# Allegro board s08-2.brd
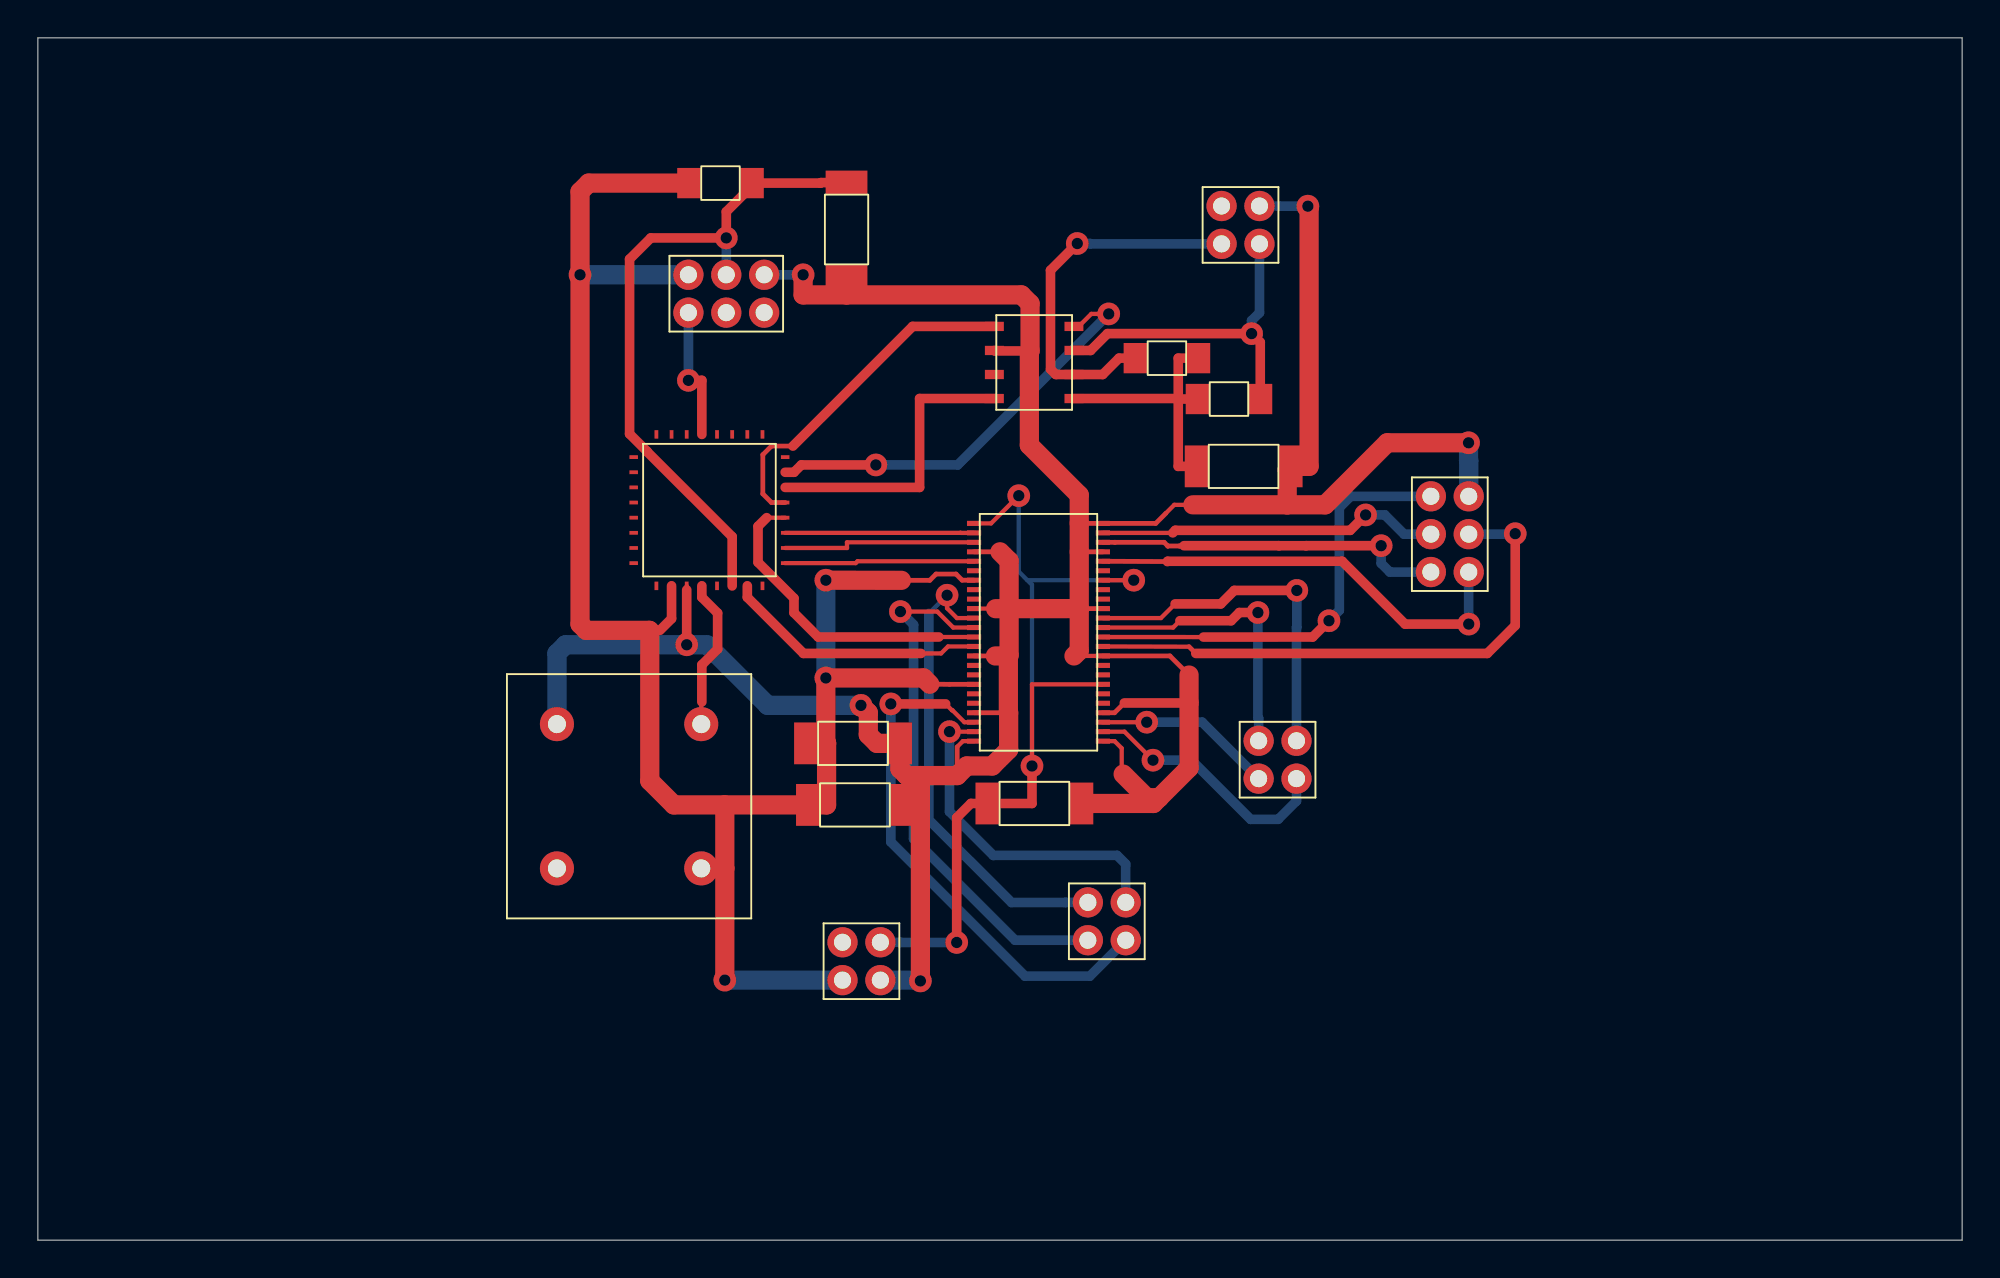
[diagram p0: board, top side]
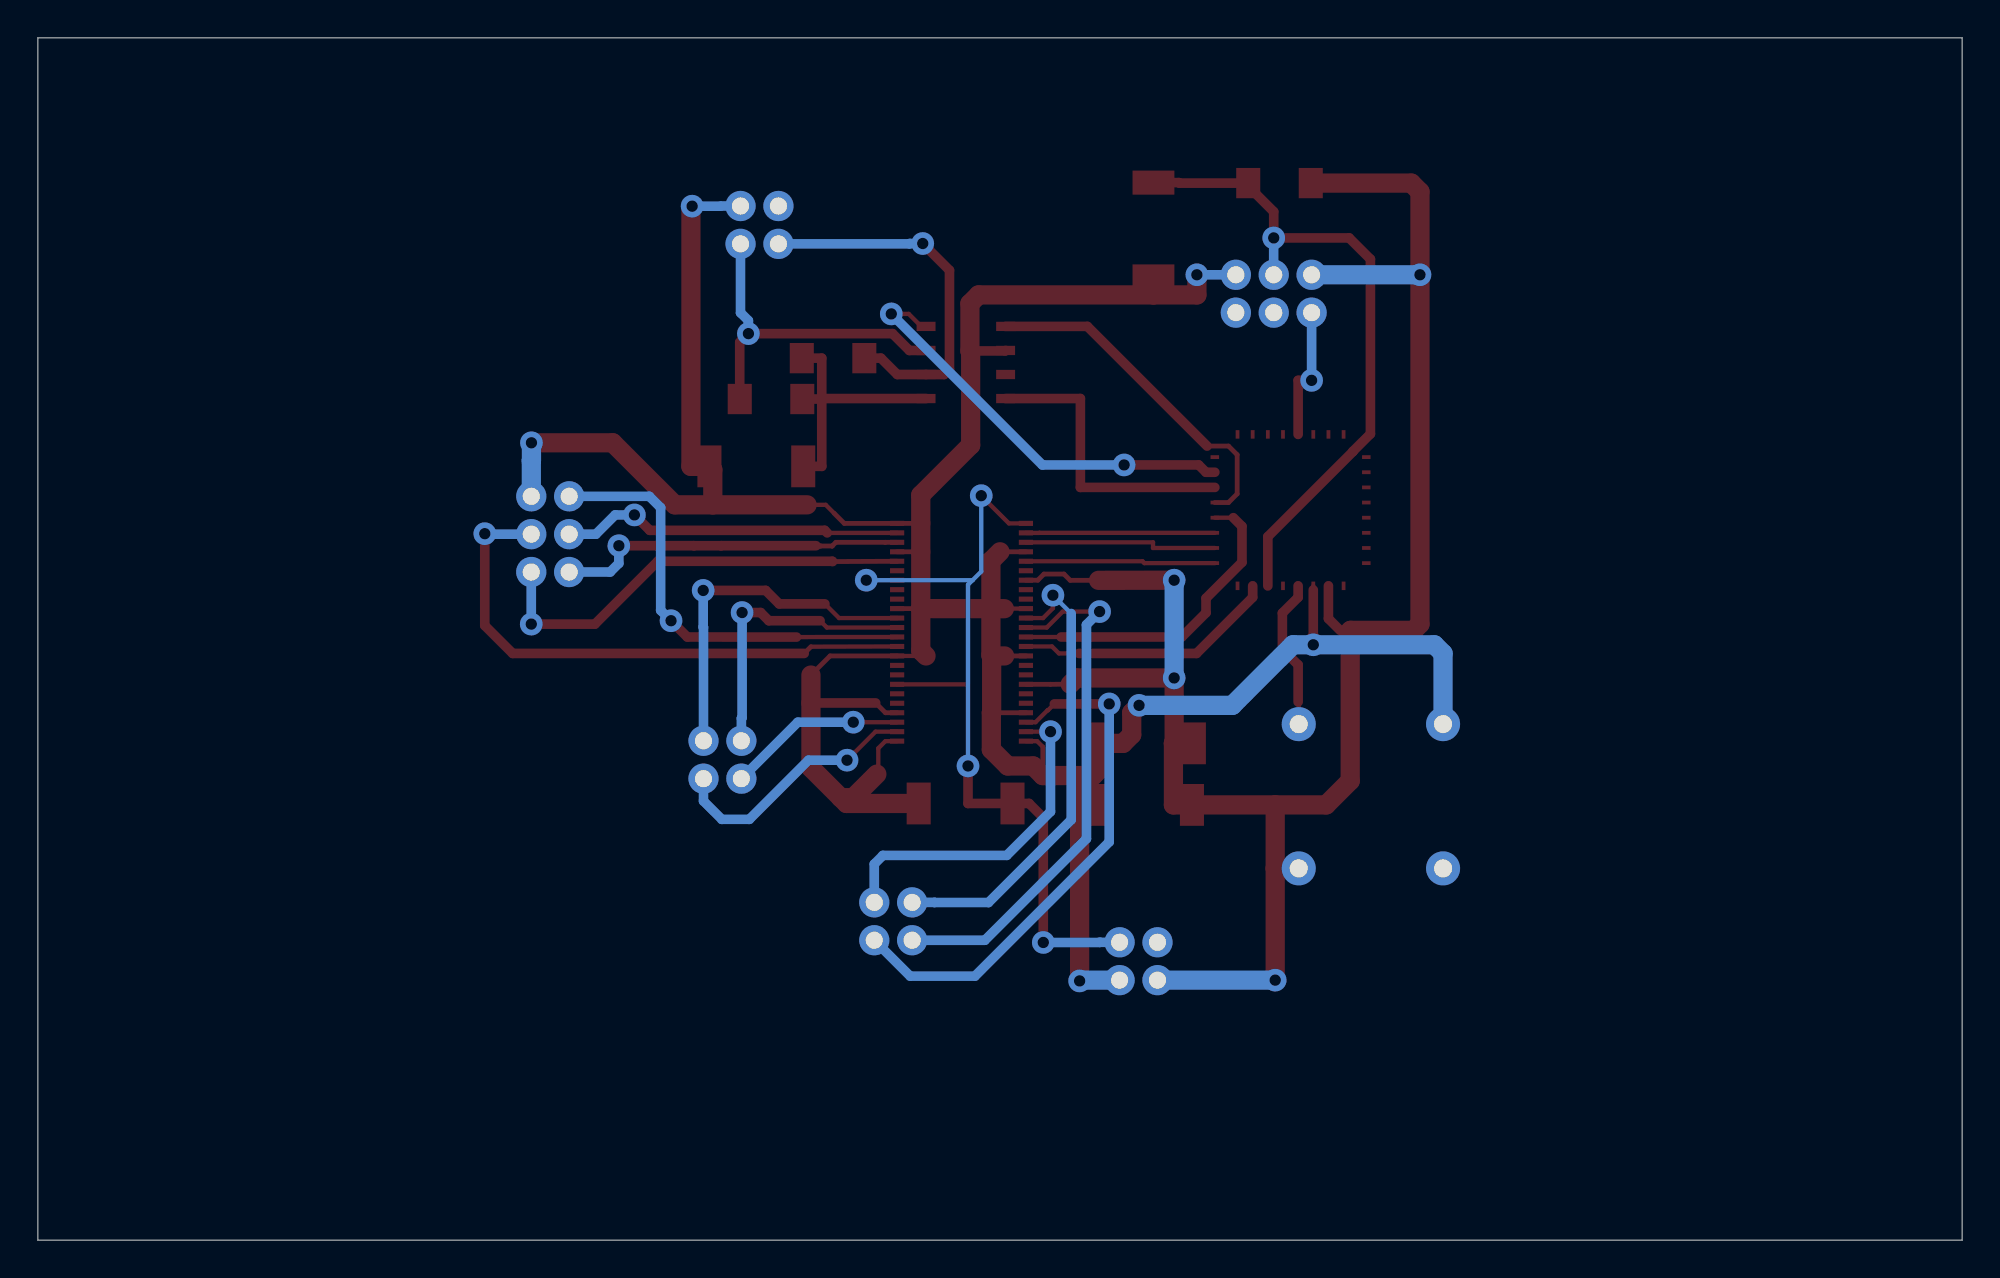
[diagram p1: board, bottom side, seen from below]

Outline 101.6 x 63.5 mm; copper layers: TOP, BOTTOM. Coordinates in mm from the lower left corner of the outline.
Outline path: 0,63.5 101.6,63.5 101.6,0 0,0 0,63.5

## Placement (name value [footprint] x y rotation side)
C9  0.1u  [SMDCAP]  43.1 26.24 0 top
C10  0.1u  [SMDCAP]  52.68 23.06 0 top
C11  0.1u  [SMDCAP]  63.6 40.87 180 top
C12  0.1u  [SMDCAP]  42.7 53.44 90 top
C13  10u  [SMDCAP]  43.21 22.99 0 top
J7  Background Header  [HEADER6]  36.35 49.99 90 top
J12  CON6  [HEADER6]  74.55 37.29 0 top
J14  CON4  [HEADER4]  43.48 14.73 270 top
J15  CON4  [HEADER4]  63.5 53.62 90 top
J16  CON4  [HEADER4]  65.46 25.37 270 top
J17  CON4  [HEADER4]  56.44 16.84 0 top
R3  60  [SMDRES]  62.89 44.42 0 top
R4  60  [SMDRES]  59.61 46.58 0 top
R5  10k  [SMDRES]  36.04 55.83 180 top
U1  MC9S08DZ60  [MC9S08_LQFP32]  35.46 38.56 90 top
U2  SN74LVC16T245  [SN74_DGG]  52.83 32.11 0 top
U3  TJA1040T  [TJA1040_SO8]  52.6 46.36 0 top
U4  -  [OSCILLATOR]  31.22 23.44 90 top

## Library data of the parts
C9 C10 C13 = C_elect_0: Tolerance: ***; User Part Number: ***
C11 = C
C12 = C: Tolerance: ***; User Part Number: ***
J7 = CONN MOD 6-6_J
J12 = CON6
J14-J17 = CON4
R3-R5 = R
U1 = MC9S08DZ60
U2 = SN74LVC16T245
U3 = TJA1040T
U4 = OSCILLATOR_0

## Footprints (pads in the part's own frame, mm; a bottom-side part is the same pattern mirrored in y, then rotated)
HEADER4
  round 1.6 hole 0.9: 1(-1,1) 2(-1,-1) 3(1,-1) 4(1,1)
HEADER6
  round 1.6 hole 0.9: 1(-1,2) 2(-1,0) 3(-1,-2) 4(1,-2) 5(1,0) 6(1,2)
MC9S08_LQFP32
  rect 0.45x0.2 smd: 1(-4,2.8) 2(-4,2) 3(-4,1.2) 4(-4,0.4) 5(-4,-0.4) 6(-4,-1.2) 7(-4,-2) 8(-4,-2.8) 17(4,-2.8) 18(4,-2) 19(4,-1.2) 20(4,-0.4) 21(4,0.4) 22(4,1.2) 23(4,2) 24(4,2.8)
  rect 0.2x0.45 smd: 9(-2.8,-4) 10(-2,-4) 11(-1.2,-4) 12(-0.4,-4) 13(0.4,-4) 14(1.2,-4) 15(2,-4) 16(2.8,-4) 25(2.8,4) 26(2,4) 27(1.2,4) 28(0.4,4) 29(-0.4,4) 30(-1.2,4) 31(-2,4) 32(-2.8,4)
OSCILLATOR
  round 1.8 hole 0.95 unplated: (-3.81,3.81) (-3.81,-3.81) (3.81,3.81) (3.81,-3.81)
SMDCAP
  rect 1.27x2.21 smd: 1(-2.54,0) 2(2.413,0)
SMDRES
  rect 1.27x1.6 smd: 1(-1.651,0) 2(1.651,0)
SN74_DGG
  rect 0.75x0.27 smd: 1(-3.4,5.75) 2(-3.4,5.25) 3(-3.4,4.75) 4(-3.4,4.25) 5(-3.4,3.75) 6(-3.4,3.25) 7(-3.4,2.75) 8(-3.4,2.25) 9(-3.4,1.75) 10(-3.4,1.25) 11(-3.4,0.75) 12(-3.4,0.25) 13(-3.4,-0.25) 14(-3.4,-0.75) 15(-3.4,-1.25) 16(-3.4,-1.75) 17(-3.4,-2.25) 18(-3.4,-2.75) 19(-3.4,-3.25) 20(-3.4,-3.75) 21(-3.4,-4.25) 22(-3.4,-4.75) 23(-3.4,-5.25) 24(-3.4,-5.75) 25(3.4,-5.75) 26(3.4,-5.25) 27(3.4,-4.75) 28(3.4,-4.25) 29(3.4,-3.75) 30(3.4,-3.25) 31(3.4,-2.75) 32(3.4,-2.25) 33(3.4,-1.75) 34(3.4,-1.25) 35(3.4,-0.75) 36(3.4,-0.25) 37(3.4,0.25) 38(3.4,0.75) 39(3.4,1.25) 40(3.4,1.75) 41(3.4,2.25) 42(3.4,2.75) 43(3.4,3.25) 44(3.4,3.75) 45(3.4,4.25) 46(3.4,4.75) 47(3.4,5.25) 48(3.4,5.75)
TJA1040_SO8
  rect 1x0.49 smd: 1(-2.1,1.905) 2(-2.1,0.635) 3(-2.1,-0.635) 4(-2.1,-1.905) 5(2.1,-1.905) 6(2.1,-0.635) 7(2.1,0.635) 8(2.1,1.905)

## Nets
GND: C9.2(-) C10.2(-) C11.1 C12.1 C13.2(-) J7.4(2) J12.6 J14.4 J15.3 U1.3(VSS) U2.4(GND#4) U2.10(GND#10) U2.15(GND#15) U2.21(GND#21) U2.24(2DIR) U2.25(2OEN) U2.28(GND#28) U2.34(GND#34) U2.39(GND#39) U2.45(GND#45) U2.48(1OEN) U3.2(GND)
VCC_1.8: C10.1(+) J14.1 U2.1(1DIR) U2.31(VCCA#31) U2.42(VCCA#42)
VCC_5.0: C9.1(+) C13.1(+) J7.6 J14.3 R5.2 U1.2(VDD) U2.7(VCCB#7) U2.18(VCCB#18)
VDD_S08: U3.3(VCC)
1A4: U2.43(1A4)
1A5: U2.41(1A5)
1A6: U2.40(1A6)
1A7: J16.1 U2.38(1A7)
1A8: J16.2 U2.37(1A8)
1B4: U2.6(1B4)
1B5: U2.8(1B5)
1B6: U2.9(1B6)
1B7: J17.1 U2.11(1B7)
1B8: J17.2 U2.12(1B8)
2A3: U2.33(2A3)
2A4: U2.32(2A4)
2A5: U2.30(2A5)
2A6: U2.29(2A6)
2A7: J16.3 U2.27(2A7)
2A8: J16.4 U2.26(2A8)
2B3: U2.16(2B3)
2B4: U2.17(2B4)
2B5: U2.19(2B5)
2B6: U2.20(2B6)
2B7: J17.3 U2.22(2B7)
2B8: J17.4 U2.23(2B8)
BKGD: J7.1 U1.21(BKGD/MS)
CANH: J15.2 R3.2 U3.7(CANH)
CANL: J15.1 R4.1 U3.6(CANL)
EXTAL: U1.4(PTG0/EXTAL)
RESET: C12.2 J7.5(4) R5.1 U1.6(RESETN)
RXCAN: U1.14(PTE7/RXD2/RXCAN) U3.4(RXD)
SPI_CLOCK_1.8V: J12.3 U2.46(1A2)
SPI_CLOCK_5V: U1.10(PTE3/SPSCK) U2.3(1B2)
SPI_CS_1.8V: J12.4 U2.44(1A3)
SPI_CS_5V: U1.9(PTE2/SSN) U2.5(1B3)
SPI_INTERRUPT_1.8V: J12.5 U2.35(2A2)
SPI_INTERRUPT_5V: U1.7(PTE0/TXD1) U2.14(2B2)
SPI_MISO_1.8V: J12.1 U2.36(2A1)
SPI_MISO_5V: U1.12(PTE5/SDA/MISO) U2.13(2B1)
SPI_MOSI_1.8V: J12.2 U2.47(1A1)
SPI_MOSI_5V: U1.11(PTE4/SCL/MOSI) U2.2(1B1)
STB: U1.15(PTD0/PID0/TPM2CH0) U3.8(STB)
TXCAN: U1.13(PTE6/TXD2/TXCAN) U3.1(TXD)
N57563: C11.2 R3.1 R4.2 U3.5(SPLIT)

Pads without a net: J7 2 3; J14 2; J15 4; U1 1 5 8 16 17 18 19 20 22 23 24 25 26 27 28 29 30 31 32

## Via types
v1: diameter 1.2, hole 0.6, TOP to BOTTOM, 33 vias

## Routing (per net, layer and track width the routed paths; a pad name or vN(x,y) marks a point on that pad's centre or on a via; arc(x,y) is an arc through that point)
GND: length 186.2
  TOP w0.229: 54.71,30.86 U2.34 ; 60.99,38.84 60,38.84 59.56,38.39 ; U2.24 48.84,26.36 48.54,26.05 ; U2.25 56.85,26.36 57.23,25.98 57.23,24.69 57.3,24.61 ; 34.26,34.34 U1.3 ; U2.10 50.57,33.36 50.57,33.35
  TOP w0.254: U2.34 59.77,30.86 60.78,29.84 ; 54.98,37.86 U2.48 59.02,37.86 59.56,38.39 ; 50.8,36.36 U2.4 ; 50.56,30.86 U2.15 ; 57.36,28.37 56.85,27.86 U2.28 ; U2.39 54.98,33.36 ; U2.45 54.98,36.36 ; 51.26,27.86 U2.21 ; 48.54,26.05 48.54,24.54
  TOP w0.508: U3.2 50.53,46.96 52.39,46.96 ; 60.78,28.37 57.36,28.37 ; 34.26,31.59 34.26,34.34
  TOP w1.016: 59.21,23.37 60.78,24.94 60.78,29.84 ; 59.21,23.37 58.55,23.37 57.3,24.61 ; 59.21,23.37 58.9,23.06 C10.2 ; 46.6,24.54 48.54,24.54 49.05,25.04 50.39,25.04 51.26,25.91 51.26,27.86 51.24,27.87 51.24,30.85 ; 46.6,24.54 46.6,22.99 ; 46.6,24.54 45.87,24.54 45.52,24.89 C9.2 44.3,26.24 43.85,26.7 43.85,27.86 v1(43.46,28.24) ; 46.6,22.99 v1(46.6,13.69) ; 46.6,22.99 C13.2 ; 51.24,30.85 50.56,30.86 ; 51.24,30.85 51.28,30.89 51.28,33.35 ; 50.57,33.35 51.28,33.35 ; 51.28,33.35 54.98,33.36 ; 51.28,33.35 51.28,35.87 50.8,36.36 ; 42.7,49.92 C12.1 ; 42.7,49.92 40.4,49.92 v1(40.4,50.99) ; 42.7,49.92 51.93,49.92 52.39,49.47 52.39,46.96 52.35,46.93 52.35,41.99 54.98,39.35 54.98,33.36 ; v1(67.06,54.61) 67.12,54.55 67.12,40.87 C11.1 65.96,40.69 65.96,38.84 ; 54.98,33.36 54.98,31.13 54.71,30.86 ; v1(34.26,31.45) 34.26,31.59 ; 60.99,38.84 65.96,38.84 ; 65.96,38.84 67.97,38.84 71.25,42.11 v1(75.54,42.11)
  BOTTOM w0.229: 65.55,54.61 65.54,54.62
  BOTTOM w0.508: v1(40.4,50.99) J7.4 ; 65.54,54.62 J15.3 ; v1(67.06,54.61) 65.55,54.61
  BOTTOM w1.016: v1(46.6,13.69) 46.55,13.73 J14.4 ; v1(75.54,42.11) 75.54,41.17 75.55,41.16 J12.6 ; 27.41,27.25 27.41,30.99 27.86,31.45 v1(34.26,31.45) 35.33,31.45 38.53,28.24 v1(43.46,28.24)
VCC_1.8: length 49.7
  TOP w0.229: U2.31 52.49,29.36 v1(52.49,25.04) ; v1(51.79,39.32) 50.33,37.86 U2.1 ; U2.42 v1(57.86,34.86)
  TOP w0.508: v1(52.49,25.04) 52.49,23.06 C10.1 49.26,23.06 48.51,22.31 v1(48.51,15.72)
  BOTTOM w0.229: 52.25,34.86 v1(57.86,34.86) ; 52.25,34.86 52.49,34.61 v1(52.49,25.04) ; 52.25,34.86 51.79,35.31 v1(51.79,39.32)
  BOTTOM w0.508: J14.1 45.53,15.73 45.54,15.72 v1(48.51,15.72)
VCC_5.0: length 105
  TOP w0.254: U2.18 48.14,29.36 47.09,29.36 ; 32.28,32.21 32.84,32.21 ; U2.7 48.8,34.86 48.48,35.18 47.42,35.18 47.09,34.85 45.59,34.85
  TOP w0.508: U1.2 33.46,32.82 32.84,32.21
  TOP w1.016: 36.27,19.63 35.03,19.63 ; 36.27,19.63 v1(36.27,13.73) ; 36.27,19.63 36.27,22.99 ; 36.27,22.99 33.58,22.99 32.31,24.26 32.31,32.18 32.28,32.21 28.96,32.21 28.63,32.54 v1(28.63,50.99) 28.63,55.37 29.08,55.83 R5.2 ; 36.27,22.99 C13.1 41.64,22.99 41.64,26.24 ; C9.1 41.64,26.24 ; 41.64,26.24 41.61,26.28 v1(41.61,29.69) 46.76,29.69 47.09,29.36 ; v1(41.61,34.86) 45.59,34.85
  BOTTOM w1.016: J7.6 v1(28.63,50.99) ; v1(41.61,34.86) v1(41.61,29.69) ; v1(36.27,13.73) J14.3
1A7: length 18.8
  TOP w0.229: U2.38 59.3,32.86 60.05,33.6
  TOP w0.508: v1(66.47,34.32) 63.17,34.32 62.46,33.6 60.05,33.6
  BOTTOM w0.508: v1(66.47,34.32) 66.47,32.38 66.46,32.37 J16.1
1A8: length 15.3
  TOP w0.229: U2.37 59.94,32.36 60.3,32.72
  TOP w0.508: v1(64.42,33.15) 63.44,33.15 63.01,32.72 60.3,32.72
  BOTTOM w0.508: v1(64.42,33.15) 64.42,27.59 64.46,27.56 J16.2
1B7: length 24.8
  TOP w0.229: U2.11 48.53,32.86 48.01,33.38 v1(48.01,34.06)
  BOTTOM w0.229: v1(48.01,34.06) 47.04,33.1
  BOTTOM w0.508: 47.04,33.1 47.04,22.2 51.41,17.83 54.25,17.83 54.26,17.84 J17.1
1B8: length 27.9
  TOP w0.229: U2.12 48.33,32.36 47.49,33.2 v1(45.54,33.2)
  BOTTOM w0.508: v1(45.54,33.2) 46.24,32.5 46.24,21.2 51.6,15.84 J17.2
2A7: length 9.5
  TOP w0.229: U2.27 v1(58.55,27.36)
  BOTTOM w0.508: J16.3 61.47,27.36 v1(58.55,27.36)
2A8: length 13.7
  TOP w0.229: U2.26 57.37,26.86 v1(58.88,25.35)
  BOTTOM w0.508: v1(58.88,25.35) 60.91,25.35 64.03,22.23 65.49,22.23 66.46,23.19 J16.4
2B7: length 28.2
  TOP w0.229: U2.22 48.92,27.36 48.29,27.99 48.27,27.99 47.93,28.32
  TOP w0.508: v1(45.03,28.32) 47.93,28.32
  BOTTOM w0.508: J17.3 55.54,13.94 52.12,13.94 45.03,21.03 v1(45.03,28.32)
2B8: length 18
  TOP w0.229: U2.23 v1(48.13,26.86)
  BOTTOM w0.508: v1(48.13,26.86) 48.13,22.63 50.44,20.32 56.98,20.32 57.44,19.86 J17.4
BKGD: length 7.1
  TOP w0.508: U1.21 35.06,45.41 v1(34.35,45.41)
  BOTTOM w0.508: v1(34.35,45.41) J7.1
CANH: length 18.3
  TOP w0.508: U3.7 55.58,46.99 56.47,47.88 v1(64.08,47.88) 64.54,47.42 R3.2
  BOTTOM w0.508: v1(64.08,47.88) 64.08,48.56 64.5,48.98 J15.2
CANL: length 19.8
  TOP w0.508: R4.1 57.09,46.58 56.22,45.72 U3.6 53.75,45.72 53.47,46 53.47,51.22 v1(54.88,52.64)
  BOTTOM w0.508: J15.1 55.58,52.62 55.57,52.64 v1(54.88,52.64)
EXTAL: length 8
  TOP w0.229: 35.06,28.43 35.03,28.4 35.03,27.25
  TOP w0.508: U1.4 35.06,33.95 35.89,33.12 35.89,31.22 35.06,30.38 35.06,28.43
RESET: length 35.5
  TOP w0.508: C12.2 41.35,55.85 41.33,55.83 R5.1 37.69,55.66 36.35,54.32 v1(36.35,52.93) 32.36,52.93 31.24,51.81 31.24,42.58 32.17,41.66 32.17,41.65 36.66,37.15 U1.6
  BOTTOM w0.508: v1(36.35,52.93) J7.5
RXCAN: length 15.7
  TOP w0.508: U1.14 46.56,39.76 46.56,44.45 U3.4
SPI_CLOCK_1.8V: length 18.5
  TOP w0.254: U2.46 56.86,36.86 59.47,36.86 59.66,36.66 60.27,36.66 60.27,36.66 60.5,36.66 60.51,36.68
  TOP w0.508: 60.51,36.68 65.53,36.68 v1(70.92,36.68)
  BOTTOM w0.508: J12.3 71.38,35.29 70.92,35.74 v1(70.92,36.68)
SPI_CLOCK_5V: length 10.3
  TOP w0.229: U2.3 42.72,36.86 42.72,36.56 U1.10
SPI_CS_1.8V: length 23.4
  TOP w0.254: 59.64,35.84 U2.44
  TOP w0.508: 59.64,35.84 59.66,35.86 68.87,35.86 72.19,32.54 v1(75.55,32.54)
  BOTTOM w0.508: v1(75.55,32.54) J12.4
SPI_CS_5V: length 10
  TOP w0.229: U2.5 43.28,35.86 43.18,35.76 U1.9
SPI_INTERRUPT_1.8V: length 29.8
  TOP w0.229: 60.78,31.34 U2.35
  TOP w0.254: 61.14,30.99 60.78,31.34
  TOP w0.508: 61.14,30.99 76.53,30.99 78,32.46 v1(78,37.31)
  BOTTOM w0.508: J12.5 77.98,37.29 v1(78,37.31)
SPI_INTERRUPT_5V: length 14
  TOP w0.229: U2.14 48.06,31.36 47.69,30.99 46.63,30.99
  TOP w0.508: U1.7 37.46,33.95 40.42,30.99 46.63,30.99
SPI_MISO_1.8V: length 23.6
  TOP w0.229: 61.54,31.85 U2.36
  TOP w0.508: 61.54,31.85 67.31,31.86 v1(68.17,32.72)
  BOTTOM w0.508: v1(68.17,32.72) 68.72,33.26 68.72,38.69 69.32,39.29 J12.1
SPI_MISO_5V: length 17
  TOP w0.229: U1.12 38.48,38.16 ; 47.57,31.86 U2.13
  TOP w0.508: 38.48,38.16 38.02,37.7 38.02,35.8 39.92,33.9 39.92,33.14 41.2,31.86 47.57,31.86
SPI_MOSI_1.8V: length 18.1
  TOP w0.229: 59.92,37.36 U2.47
  TOP w0.508: v1(70.1,38.3) 69.29,37.49 60.06,37.49 59.92,37.36
  BOTTOM w0.508: v1(70.1,38.3) 71.12,38.3 72.14,37.29 J12.2
SPI_MOSI_5V: length 10
  TOP w0.229: U2.2 48.71,37.36 48.71,37.36 U1.11
STB: length 22.7
  TOP w0.229: v1(56.54,48.92) 55.62,48.92 54.96,48.26 U3.8
  TOP w0.508: v1(44.25,40.94) 40.31,40.94 39.92,40.56 U1.15
  BOTTOM w0.508: v1(56.54,48.92) 48.56,40.94 v1(44.25,40.94)
TXCAN: length 18.5
  TOP w0.254: 39.87,41.94 38.73,41.94 38.28,41.48 38.28,39.41 38.73,38.96 U1.13
  TOP w0.508: 39.87,41.94 46.19,48.26 U3.1
N57563: length 14.3
  TOP w0.508: 60.21,44.45 60.21,44.42 ; 60.21,44.45 U3.5 ; 60.21,44.45 60.21,46.58 R4.2 ; 60.21,44.42 60.21,40.87 C11.2 ; 60.21,44.42 R3.1
